# EAGLE board LPS22HP_pcb_v2_tiled (EAGLE 8.2.2)
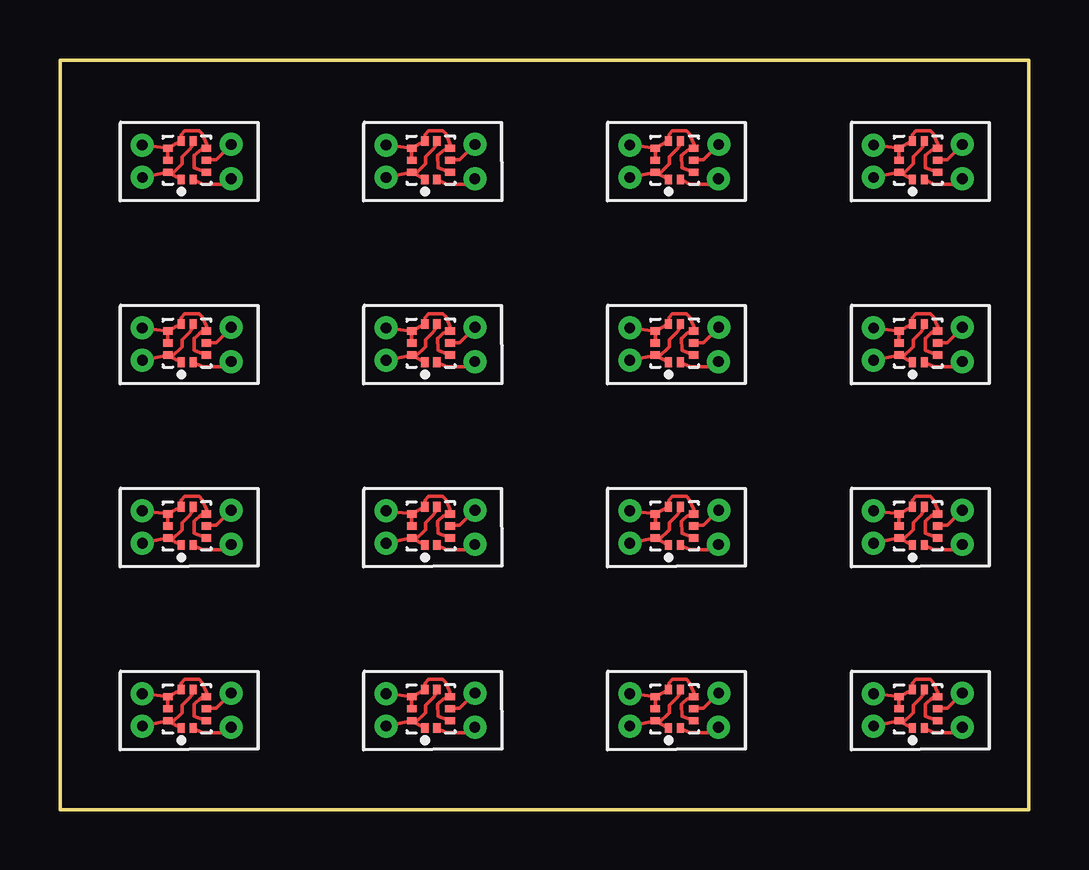
[diagram p0: board, top side]
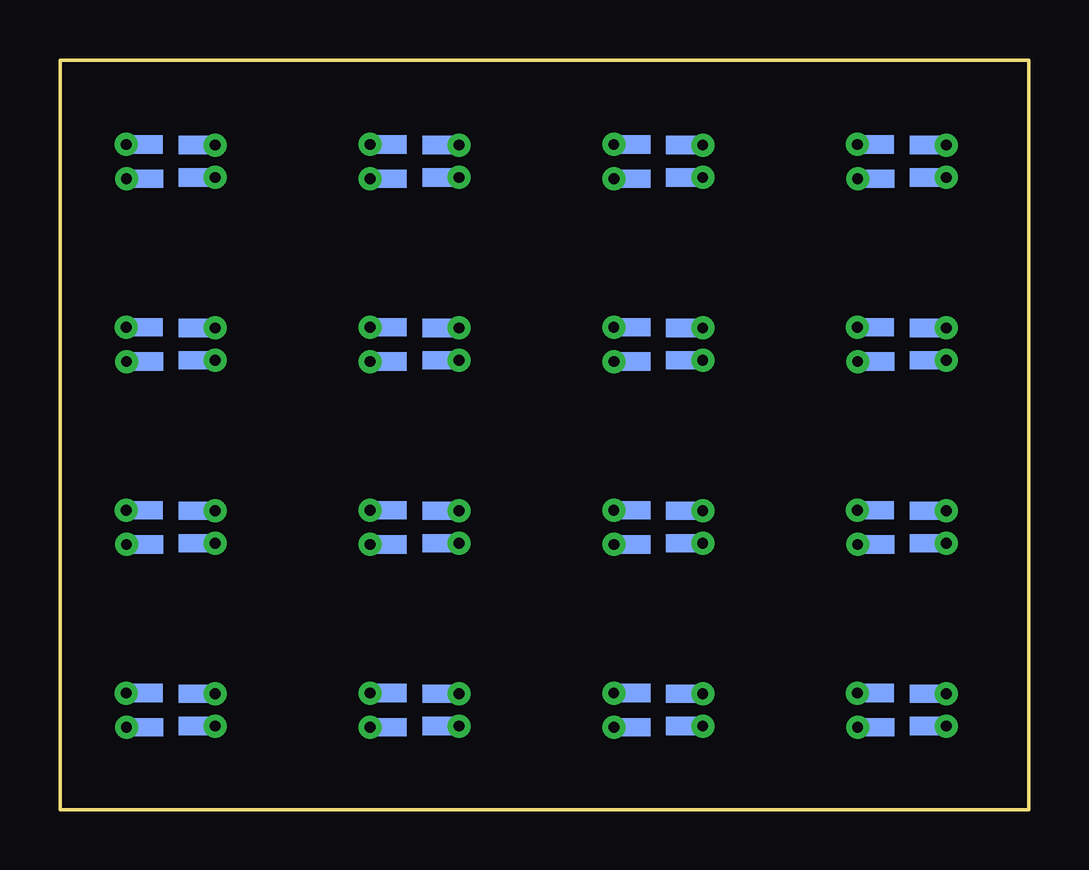
[diagram p1: board, bottom side, seen from below]

Size 40.39 x 31.24 mm. Coordinates in mm from the lower left corner, seen from the top.
Outline: 0,0 0,31.24 40.39,31.24 40.39,0 0,0
Copper layers (1*16): Top 0.035mm / dielectric 1.5mm / Bottom 0.035mm
Design rules "default": minimum track width 6mil, minimum drill 0.35mm, track to track 6mil, track to pad 6mil, pad to pad 6mil, via to via 6mil, smd to smd 6mil, copper to edge 40mil, drill to drill 6mil, minimum pad ring 10mil, minimum via ring 8mil, stop-mask expansion 4mil, vias tented up to drill 0mil, thermal gap 10mil

## Footprints (pad centres in the part's own frame; a part is rotated, then mirrored left to right if it is on the bottom)
LGA10R50P2X3_200X200X80 = smd 0.4 x 0.3: 1 -0.8,0.25; 2 -0.8,-0.25; 6 0.8,-0.25; 7 0.8,0.25 | smd 0.3 x 0.4: 3 -0.5,-0.8; 4 0,-0.8; 5 0.5,-0.8; 8 0.5,0.8; 9 0,0.8; 10 -0.5,0.8
WIREPAD_0,6/0,4_PAD = drill 0.45 pad 0.813: P$1 0,0.051 | smd 0.762 x 1.27: P$2 0,-0.838

## Placement (x,y rotation side)
U1  LPS22HB  [LGA10R50P2X3_200X200X80]  5.3,4.21 90 top
U2  LPS22HB  [LGA10R50P2X3_200X200X80]  5.3,11.83 90 top
U3  LPS22HB  [LGA10R50P2X3_200X200X80]  5.3,19.45 90 top
U4  LPS22HB  [LGA10R50P2X3_200X200X80]  5.3,27.07 90 top
U5  LPS22HB  [LGA10R50P2X3_200X200X80]  15.46,4.21 90 top
U6  LPS22HB  [LGA10R50P2X3_200X200X80]  15.46,11.83 90 top
U7  LPS22HB  [LGA10R50P2X3_200X200X80]  15.46,19.45 90 top
U8  LPS22HB  [LGA10R50P2X3_200X200X80]  15.46,27.07 90 top
U9  LPS22HB  [LGA10R50P2X3_200X200X80]  25.62,4.21 90 top
U10  LPS22HB  [LGA10R50P2X3_200X200X80]  25.62,11.83 90 top
U11  LPS22HB  [LGA10R50P2X3_200X200X80]  25.62,19.45 90 top
U12  LPS22HB  [LGA10R50P2X3_200X200X80]  25.62,27.07 90 top
U13  LPS22HB  [LGA10R50P2X3_200X200X80]  35.78,4.21 90 top
U14  LPS22HB  [LGA10R50P2X3_200X200X80]  35.78,11.83 90 top
U15  LPS22HB  [LGA10R50P2X3_200X200X80]  35.78,19.45 90 top
U16  LPS22HB  [LGA10R50P2X3_200X200X80]  35.78,27.07 90 top
U$1  WIREPAD_PADWIREPAD_0,6/0,4_PAD  [WIREPAD_0,6/0,4_PAD]  3.48,3.49 270 bottom
U$2  WIREPAD_PADWIREPAD_0,6/0,4_PAD  [WIREPAD_0,6/0,4_PAD]  3.48,4.84 270 bottom
U$3  WIREPAD_PADWIREPAD_0,6/0,4_PAD  [WIREPAD_0,6/0,4_PAD]  7.08,11.06 90 bottom
U$4  WIREPAD_PADWIREPAD_0,6/0,4_PAD  [WIREPAD_0,6/0,4_PAD]  7.09,12.48 90 bottom
U$5  WIREPAD_PADWIREPAD_0,6/0,4_PAD  [WIREPAD_0,6/0,4_PAD]  3.48,11.11 270 bottom
U$6  WIREPAD_PADWIREPAD_0,6/0,4_PAD  [WIREPAD_0,6/0,4_PAD]  7.08,3.44 90 bottom
U$7  WIREPAD_PADWIREPAD_0,6/0,4_PAD  [WIREPAD_0,6/0,4_PAD]  7.09,4.86 90 bottom
U$8  WIREPAD_PADWIREPAD_0,6/0,4_PAD  [WIREPAD_0,6/0,4_PAD]  3.48,12.46 270 bottom
U$9  WIREPAD_PADWIREPAD_0,6/0,4_PAD  [WIREPAD_0,6/0,4_PAD]  7.08,18.68 90 bottom
U$10  WIREPAD_PADWIREPAD_0,6/0,4_PAD  [WIREPAD_0,6/0,4_PAD]  7.09,20.1 90 bottom
U$11  WIREPAD_PADWIREPAD_0,6/0,4_PAD  [WIREPAD_0,6/0,4_PAD]  3.48,18.73 270 bottom
U$12  WIREPAD_PADWIREPAD_0,6/0,4_PAD  [WIREPAD_0,6/0,4_PAD]  3.48,20.08 270 bottom
U$13  WIREPAD_PADWIREPAD_0,6/0,4_PAD  [WIREPAD_0,6/0,4_PAD]  7.08,26.3 90 bottom
U$14  WIREPAD_PADWIREPAD_0,6/0,4_PAD  [WIREPAD_0,6/0,4_PAD]  7.09,27.72 90 bottom
U$15  WIREPAD_PADWIREPAD_0,6/0,4_PAD  [WIREPAD_0,6/0,4_PAD]  3.48,26.35 270 bottom
U$16  WIREPAD_PADWIREPAD_0,6/0,4_PAD  [WIREPAD_0,6/0,4_PAD]  3.48,27.7 270 bottom
U$17  WIREPAD_PADWIREPAD_0,6/0,4_PAD  [WIREPAD_0,6/0,4_PAD]  17.24,3.44 90 bottom
U$18  WIREPAD_PADWIREPAD_0,6/0,4_PAD  [WIREPAD_0,6/0,4_PAD]  17.25,4.86 90 bottom
U$19  WIREPAD_PADWIREPAD_0,6/0,4_PAD  [WIREPAD_0,6/0,4_PAD]  13.64,3.49 270 bottom
U$20  WIREPAD_PADWIREPAD_0,6/0,4_PAD  [WIREPAD_0,6/0,4_PAD]  13.64,4.84 270 bottom
U$21  WIREPAD_PADWIREPAD_0,6/0,4_PAD  [WIREPAD_0,6/0,4_PAD]  17.24,11.06 90 bottom
U$22  WIREPAD_PADWIREPAD_0,6/0,4_PAD  [WIREPAD_0,6/0,4_PAD]  17.25,12.48 90 bottom
U$23  WIREPAD_PADWIREPAD_0,6/0,4_PAD  [WIREPAD_0,6/0,4_PAD]  13.64,11.11 270 bottom
U$24  WIREPAD_PADWIREPAD_0,6/0,4_PAD  [WIREPAD_0,6/0,4_PAD]  13.64,12.46 270 bottom
U$25  WIREPAD_PADWIREPAD_0,6/0,4_PAD  [WIREPAD_0,6/0,4_PAD]  17.24,18.68 90 bottom
U$26  WIREPAD_PADWIREPAD_0,6/0,4_PAD  [WIREPAD_0,6/0,4_PAD]  17.25,20.1 90 bottom
U$27  WIREPAD_PADWIREPAD_0,6/0,4_PAD  [WIREPAD_0,6/0,4_PAD]  13.64,18.73 270 bottom
U$28  WIREPAD_PADWIREPAD_0,6/0,4_PAD  [WIREPAD_0,6/0,4_PAD]  13.64,20.08 270 bottom
U$29  WIREPAD_PADWIREPAD_0,6/0,4_PAD  [WIREPAD_0,6/0,4_PAD]  17.24,26.3 90 bottom
U$30  WIREPAD_PADWIREPAD_0,6/0,4_PAD  [WIREPAD_0,6/0,4_PAD]  17.25,27.72 90 bottom
U$31  WIREPAD_PADWIREPAD_0,6/0,4_PAD  [WIREPAD_0,6/0,4_PAD]  13.64,26.35 270 bottom
U$32  WIREPAD_PADWIREPAD_0,6/0,4_PAD  [WIREPAD_0,6/0,4_PAD]  13.64,27.7 270 bottom
U$33  WIREPAD_PADWIREPAD_0,6/0,4_PAD  [WIREPAD_0,6/0,4_PAD]  27.4,3.44 90 bottom
U$34  WIREPAD_PADWIREPAD_0,6/0,4_PAD  [WIREPAD_0,6/0,4_PAD]  27.41,4.86 90 bottom
U$35  WIREPAD_PADWIREPAD_0,6/0,4_PAD  [WIREPAD_0,6/0,4_PAD]  23.8,3.49 270 bottom
U$36  WIREPAD_PADWIREPAD_0,6/0,4_PAD  [WIREPAD_0,6/0,4_PAD]  23.8,4.84 270 bottom
U$37  WIREPAD_PADWIREPAD_0,6/0,4_PAD  [WIREPAD_0,6/0,4_PAD]  27.4,11.06 90 bottom
U$38  WIREPAD_PADWIREPAD_0,6/0,4_PAD  [WIREPAD_0,6/0,4_PAD]  27.41,12.48 90 bottom
U$39  WIREPAD_PADWIREPAD_0,6/0,4_PAD  [WIREPAD_0,6/0,4_PAD]  23.8,11.11 270 bottom
U$40  WIREPAD_PADWIREPAD_0,6/0,4_PAD  [WIREPAD_0,6/0,4_PAD]  23.8,12.46 270 bottom
U$41  WIREPAD_PADWIREPAD_0,6/0,4_PAD  [WIREPAD_0,6/0,4_PAD]  27.4,18.68 90 bottom
U$42  WIREPAD_PADWIREPAD_0,6/0,4_PAD  [WIREPAD_0,6/0,4_PAD]  27.41,20.1 90 bottom
U$43  WIREPAD_PADWIREPAD_0,6/0,4_PAD  [WIREPAD_0,6/0,4_PAD]  23.8,18.73 270 bottom
U$44  WIREPAD_PADWIREPAD_0,6/0,4_PAD  [WIREPAD_0,6/0,4_PAD]  23.8,20.08 270 bottom
U$45  WIREPAD_PADWIREPAD_0,6/0,4_PAD  [WIREPAD_0,6/0,4_PAD]  27.4,26.3 90 bottom
U$46  WIREPAD_PADWIREPAD_0,6/0,4_PAD  [WIREPAD_0,6/0,4_PAD]  27.41,27.72 90 bottom
U$47  WIREPAD_PADWIREPAD_0,6/0,4_PAD  [WIREPAD_0,6/0,4_PAD]  23.8,26.35 270 bottom
U$48  WIREPAD_PADWIREPAD_0,6/0,4_PAD  [WIREPAD_0,6/0,4_PAD]  23.8,27.7 270 bottom
U$49  WIREPAD_PADWIREPAD_0,6/0,4_PAD  [WIREPAD_0,6/0,4_PAD]  37.56,3.44 90 bottom
U$50  WIREPAD_PADWIREPAD_0,6/0,4_PAD  [WIREPAD_0,6/0,4_PAD]  37.57,4.86 90 bottom
U$51  WIREPAD_PADWIREPAD_0,6/0,4_PAD  [WIREPAD_0,6/0,4_PAD]  33.96,3.49 270 bottom
U$52  WIREPAD_PADWIREPAD_0,6/0,4_PAD  [WIREPAD_0,6/0,4_PAD]  33.96,4.84 270 bottom
U$53  WIREPAD_PADWIREPAD_0,6/0,4_PAD  [WIREPAD_0,6/0,4_PAD]  37.56,11.06 90 bottom
U$54  WIREPAD_PADWIREPAD_0,6/0,4_PAD  [WIREPAD_0,6/0,4_PAD]  37.57,12.48 90 bottom
U$55  WIREPAD_PADWIREPAD_0,6/0,4_PAD  [WIREPAD_0,6/0,4_PAD]  33.96,11.11 270 bottom
U$56  WIREPAD_PADWIREPAD_0,6/0,4_PAD  [WIREPAD_0,6/0,4_PAD]  33.96,12.46 270 bottom
U$57  WIREPAD_PADWIREPAD_0,6/0,4_PAD  [WIREPAD_0,6/0,4_PAD]  37.56,18.68 90 bottom
U$58  WIREPAD_PADWIREPAD_0,6/0,4_PAD  [WIREPAD_0,6/0,4_PAD]  37.57,20.1 90 bottom
U$59  WIREPAD_PADWIREPAD_0,6/0,4_PAD  [WIREPAD_0,6/0,4_PAD]  33.96,18.73 270 bottom
U$60  WIREPAD_PADWIREPAD_0,6/0,4_PAD  [WIREPAD_0,6/0,4_PAD]  33.96,20.08 270 bottom
U$61  WIREPAD_PADWIREPAD_0,6/0,4_PAD  [WIREPAD_0,6/0,4_PAD]  37.56,26.3 90 bottom
U$62  WIREPAD_PADWIREPAD_0,6/0,4_PAD  [WIREPAD_0,6/0,4_PAD]  37.57,27.72 90 bottom
U$63  WIREPAD_PADWIREPAD_0,6/0,4_PAD  [WIREPAD_0,6/0,4_PAD]  33.96,26.35 270 bottom
U$64  WIREPAD_PADWIREPAD_0,6/0,4_PAD  [WIREPAD_0,6/0,4_PAD]  33.96,27.7 270 bottom

## Library data of the parts
U1-U16 = LPS22HB; AVAILABILITY: Unavailable; DESCRIPTION: MEMS nano pressure sensor: 260-1260 hPa absolute digital output barometer; MF: STMicroelectronics; MP: LPS22HB; PACKAGE: None; PRICE: None
U$1-U$64 = Sombeck_lib

## Nets
+3V1: U2.1 U2.6 U2.10 U$5.P$1 U$5.P$2
+3V2: U3.1 U3.6 U3.10 U$11.P$1 U$11.P$2
+3V3: U1.1 U1.6 U1.10 U$1.P$1 U$1.P$2
+3V4: U4.1 U4.6 U4.10 U$15.P$1 U$15.P$2
+3V5: U5.1 U5.6 U5.10 U$19.P$1 U$19.P$2
+3V6: U6.1 U6.6 U6.10 U$23.P$1 U$23.P$2
+3V7: U7.1 U7.6 U7.10 U$27.P$1 U$27.P$2
+3V8: U8.1 U8.6 U8.10 U$31.P$1 U$31.P$2
+3V9: U9.1 U9.6 U9.10 U$35.P$1 U$35.P$2
+3V10: U10.1 U10.6 U10.10 U$39.P$1 U$39.P$2
+3V11: U11.1 U11.6 U11.10 U$43.P$1 U$43.P$2
+3V12: U12.1 U12.6 U12.10 U$47.P$1 U$47.P$2
+3V13: U13.1 U13.6 U13.10 U$51.P$1 U$51.P$2
+3V14: U14.1 U14.6 U14.10 U$55.P$1 U$55.P$2
+3V15: U15.1 U15.6 U15.10 U$59.P$1 U$59.P$2
+3V16: U16.1 U16.6 U16.10 U$63.P$1 U$63.P$2
GND: U1.3 U1.5 U1.7 U1.8 U1.9 U$2.P$1 U$2.P$2
GND1: U2.3 U2.5 U2.7 U2.8 U2.9 U$8.P$1 U$8.P$2
GND2: U3.3 U3.5 U3.7 U3.8 U3.9 U$12.P$1 U$12.P$2
GND3: U4.3 U4.5 U4.7 U4.8 U4.9 U$16.P$1 U$16.P$2
GND4: U5.3 U5.5 U5.7 U5.8 U5.9 U$20.P$1 U$20.P$2
GND5: U6.3 U6.5 U6.7 U6.8 U6.9 U$24.P$1 U$24.P$2
GND6: U7.3 U7.5 U7.7 U7.8 U7.9 U$28.P$1 U$28.P$2
GND7: U8.3 U8.5 U8.7 U8.8 U8.9 U$32.P$1 U$32.P$2
GND8: U9.3 U9.5 U9.7 U9.8 U9.9 U$36.P$1 U$36.P$2
GND9: U10.3 U10.5 U10.7 U10.8 U10.9 U$40.P$1 U$40.P$2
GND10: U11.3 U11.5 U11.7 U11.8 U11.9 U$44.P$1 U$44.P$2
GND11: U12.3 U12.5 U12.7 U12.8 U12.9 U$48.P$1 U$48.P$2
GND12: U13.3 U13.5 U13.7 U13.8 U13.9 U$52.P$1 U$52.P$2
GND13: U14.3 U14.5 U14.7 U14.8 U14.9 U$56.P$1 U$56.P$2
GND14: U15.3 U15.5 U15.7 U15.8 U15.9 U$60.P$1 U$60.P$2
GND15: U16.3 U16.5 U16.7 U16.8 U16.9 U$64.P$1 U$64.P$2
N$1: U2.2 U$3.P$1 U$3.P$2
N$2: U1.2 U$6.P$1 U$6.P$2
N$3: U1.4 U$7.P$1 U$7.P$2
N$4: U2.4 U$4.P$1 U$4.P$2
N$5: U3.2 U$9.P$1 U$9.P$2
N$6: U3.4 U$10.P$1 U$10.P$2
N$7: U4.2 U$13.P$1 U$13.P$2
N$8: U4.4 U$14.P$1 U$14.P$2
N$9: U5.2 U$17.P$1 U$17.P$2
N$10: U5.4 U$18.P$1 U$18.P$2
N$11: U6.2 U$21.P$1 U$21.P$2
N$12: U6.4 U$22.P$1 U$22.P$2
N$13: U7.2 U$25.P$1 U$25.P$2
N$14: U7.4 U$26.P$1 U$26.P$2
N$15: U8.2 U$29.P$1 U$29.P$2
N$16: U8.4 U$30.P$1 U$30.P$2
N$17: U9.2 U$33.P$1 U$33.P$2
N$18: U9.4 U$34.P$1 U$34.P$2
N$19: U10.2 U$37.P$1 U$37.P$2
N$20: U10.4 U$38.P$1 U$38.P$2
N$21: U11.2 U$41.P$1 U$41.P$2
N$22: U11.4 U$42.P$1 U$42.P$2
N$23: U12.2 U$45.P$1 U$45.P$2
N$24: U12.4 U$46.P$1 U$46.P$2
N$25: U13.2 U$49.P$1 U$49.P$2
N$26: U13.4 U$50.P$1 U$50.P$2
N$27: U14.2 U$53.P$1 U$53.P$2
N$28: U14.4 U$54.P$1 U$54.P$2
N$29: U15.2 U$57.P$1 U$57.P$2
N$30: U15.4 U$58.P$1 U$58.P$2
N$31: U16.2 U$61.P$1 U$61.P$2
N$32: U16.4 U$62.P$1 U$62.P$2

## Tracks (layer width: path | path; a pad name or v marks a point on that pad's centre or on a via)
+3V1
  Top 0.152: U2.1 U2.10 | U$5.P$1 U2.10 | U2.10 4.65,11.25 5.08,11.67 5.08,11.97 5.4,12.28 5.55,12.48 U2.6
  Bottom 0.152: U$5.P$1 U$5.P$2
+3V2
  Top 0.152: U3.1 U3.10 | U$11.P$1 U3.10 | U3.10 4.65,18.87 5.08,19.29 5.08,19.59 5.4,19.9 5.55,20.1 U3.6
  Bottom 0.152: U$11.P$1 U$11.P$2
+3V3
  Top 0.152: U1.1 U1.10 | U$1.P$1 U1.10 | U1.10 4.65,3.63 5.08,4.05 5.08,4.35 5.4,4.66 5.55,4.86 U1.6
  Bottom 0.152: U$1.P$1 U$1.P$2
+3V4
  Top 0.152: U4.1 U4.10 | U$15.P$1 U4.10 | U4.10 4.65,26.49 5.08,26.91 5.08,27.21 5.4,27.52 5.55,27.72 U4.6
  Bottom 0.152: U$15.P$1 U$15.P$2
+3V5
  Top 0.152: U5.1 U5.10 | U$19.P$1 U5.10 | U5.10 14.81,3.63 15.24,4.05 15.24,4.35 15.56,4.66 15.71,4.86 U5.6
  Bottom 0.152: U$19.P$1 U$19.P$2
+3V6
  Top 0.152: U6.1 U6.10 | U$23.P$1 U6.10 | U6.10 14.81,11.25 15.24,11.67 15.24,11.97 15.56,12.28 15.71,12.48 U6.6
  Bottom 0.152: U$23.P$1 U$23.P$2
+3V7
  Top 0.152: U7.1 U7.10 | U$27.P$1 U7.10 | U7.10 14.81,18.87 15.24,19.29 15.24,19.59 15.56,19.9 15.71,20.1 U7.6
  Bottom 0.152: U$27.P$1 U$27.P$2
+3V8
  Top 0.152: U8.1 U8.10 | U$31.P$1 U8.10 | U8.10 14.81,26.49 15.24,26.91 15.24,27.21 15.56,27.52 15.71,27.72 U8.6
  Bottom 0.152: U$31.P$1 U$31.P$2
+3V9
  Top 0.152: U9.1 U9.10 | U$35.P$1 U9.10 | U9.10 24.97,3.63 25.41,4.05 25.41,4.35 25.72,4.66 25.87,4.86 U9.6
  Bottom 0.152: U$35.P$1 U$35.P$2
+3V10
  Top 0.152: U10.1 U10.10 | U$39.P$1 U10.10 | U10.10 24.97,11.25 25.41,11.67 25.41,11.97 25.72,12.28 25.87,12.48 U10.6
  Bottom 0.152: U$39.P$1 U$39.P$2
+3V11
  Top 0.152: U11.1 U11.10 | U$43.P$1 U11.10 | U11.10 24.97,18.87 25.41,19.29 25.41,19.59 25.72,19.9 25.87,20.1 U11.6
  Bottom 0.152: U$43.P$1 U$43.P$2
+3V12
  Top 0.152: U12.1 U12.10 | U$47.P$1 U12.10 | U12.10 24.97,26.49 25.41,26.91 25.41,27.21 25.72,27.52 25.87,27.72 U12.6
  Bottom 0.152: U$47.P$1 U$47.P$2
+3V13
  Top 0.152: U13.1 U13.10 | U$51.P$1 U13.10 | U13.10 35.13,3.63 35.56,4.05 35.56,4.35 35.88,4.66 36.03,4.86 U13.6
  Bottom 0.152: U$51.P$1 U$51.P$2
+3V14
  Top 0.152: U14.1 U14.10 | U$55.P$1 U14.10 | U14.10 35.13,11.25 35.56,11.67 35.56,11.97 35.88,12.28 36.03,12.48 U14.6
  Bottom 0.152: U$55.P$1 U$55.P$2
+3V15
  Top 0.152: U15.1 U15.10 | U$59.P$1 U15.10 | U15.10 35.13,18.87 35.56,19.29 35.56,19.59 35.88,19.9 36.03,20.1 U15.6
  Bottom 0.152: U$59.P$1 U$59.P$2
+3V16
  Top 0.152: U16.1 U16.10 | U$63.P$1 U16.10 | U16.10 35.13,26.49 35.56,26.91 35.56,27.21 35.88,27.52 36.03,27.72 U16.6
  Bottom 0.152: U$63.P$1 U$63.P$2
GND
  Top 0.152: U1.9 U1.8 | U1.8 3.74,4.81 U$2.P$1 | U1.8 U1.7 5.05,5.11 5.06,5.27 5.2,5.44 5.79,5.44 5.93,5.3 6.11,4.88 U1.5 5.93,4.68 5.81,4.61 5.65,4.46 5.59,4.41 5.6,3.9 U1.3
  Bottom 0.152: U$2.P$1 U$2.P$2
GND1
  Top 0.152: U2.9 U2.8 | U2.8 3.74,12.43 U$8.P$1 | U2.8 U2.7 5.05,12.73 5.06,12.89 5.2,13.06 5.79,13.06 5.93,12.92 6.11,12.5 U2.5 5.93,12.3 5.81,12.23 5.65,12.08 5.59,12.03 5.6,11.52 U2.3
  Bottom 0.152: U$8.P$1 U$8.P$2
GND2
  Top 0.152: U3.9 U3.8 | U3.8 3.74,20.05 U$12.P$1 | U3.8 U3.7 5.05,20.35 5.06,20.51 5.2,20.68 5.79,20.68 5.93,20.54 6.11,20.12 U3.5 5.93,19.92 5.81,19.85 5.65,19.7 5.59,19.65 5.6,19.14 U3.3
  Bottom 0.152: U$12.P$1 U$12.P$2
GND3
  Top 0.152: U4.9 U4.8 | U4.8 3.74,27.67 U$16.P$1 | U4.8 U4.7 5.05,27.97 5.06,28.13 5.2,28.3 5.79,28.3 5.93,28.16 6.11,27.74 U4.5 5.93,27.54 5.81,27.47 5.65,27.32 5.59,27.27 5.6,26.76 U4.3
  Bottom 0.152: U$16.P$1 U$16.P$2
GND4
  Top 0.152: U5.9 U5.8 | U5.8 13.9,4.81 U$20.P$1 | U5.8 U5.7 15.21,5.11 15.22,5.27 15.36,5.44 15.95,5.44 16.09,5.3 16.27,4.88 U5.5 16.09,4.68 15.97,4.61 15.81,4.46 15.75,4.41 15.76,3.9 U5.3
  Bottom 0.152: U$20.P$1 U$20.P$2
GND5
  Top 0.152: U6.9 U6.8 | U6.8 13.9,12.43 U$24.P$1 | U6.8 U6.7 15.21,12.73 15.22,12.89 15.36,13.06 15.95,13.06 16.09,12.92 16.27,12.5 U6.5 16.09,12.3 15.97,12.23 15.81,12.08 15.75,12.03 15.76,11.52 U6.3
  Bottom 0.152: U$24.P$1 U$24.P$2
GND6
  Top 0.152: U7.9 U7.8 | U7.8 13.9,20.05 U$28.P$1 | U7.8 U7.7 15.21,20.35 15.22,20.51 15.36,20.68 15.95,20.68 16.09,20.54 16.27,20.12 U7.5 16.09,19.92 15.97,19.85 15.81,19.7 15.75,19.65 15.76,19.14 U7.3
  Bottom 0.152: U$28.P$1 U$28.P$2
GND7
  Top 0.152: U8.9 U8.8 | U8.8 13.9,27.67 U$32.P$1 | U8.8 U8.7 15.21,27.97 15.22,28.13 15.36,28.3 15.95,28.3 16.09,28.16 16.27,27.74 U8.5 16.09,27.54 15.97,27.47 15.81,27.32 15.75,27.27 15.76,26.76 U8.3
  Bottom 0.152: U$32.P$1 U$32.P$2
GND8
  Top 0.152: U9.9 U9.8 | U9.8 24.06,4.81 U$36.P$1 | U9.8 U9.7 25.37,5.11 25.38,5.27 25.52,5.44 26.11,5.44 26.25,5.3 26.43,4.88 U9.5 26.25,4.68 26.13,4.61 25.97,4.46 25.91,4.41 25.92,3.9 U9.3
  Bottom 0.152: U$36.P$1 U$36.P$2
GND9
  Top 0.152: U10.9 U10.8 | U10.8 24.06,12.43 U$40.P$1 | U10.8 U10.7 25.37,12.73 25.38,12.89 25.52,13.06 26.11,13.06 26.25,12.92 26.43,12.5 U10.5 26.25,12.3 26.13,12.23 25.97,12.08 25.91,12.03 25.92,11.52 U10.3
  Bottom 0.152: U$40.P$1 U$40.P$2
GND10
  Top 0.152: U11.9 U11.8 | U11.8 24.06,20.05 U$44.P$1 | U11.8 U11.7 25.37,20.35 25.38,20.51 25.52,20.68 26.11,20.68 26.25,20.54 26.43,20.12 U11.5 26.25,19.92 26.13,19.85 25.97,19.7 25.91,19.65 25.92,19.14 U11.3
  Bottom 0.152: U$44.P$1 U$44.P$2
GND11
  Top 0.152: U12.9 U12.8 | U12.8 24.06,27.67 U$48.P$1 | U12.8 U12.7 25.37,27.97 25.38,28.13 25.52,28.3 26.11,28.3 26.25,28.16 26.43,27.74 U12.5 26.25,27.54 26.13,27.47 25.97,27.32 25.91,27.27 25.92,26.76 U12.3
  Bottom 0.152: U$48.P$1 U$48.P$2
GND12
  Top 0.152: U13.9 U13.8 | U13.8 34.22,4.81 U$52.P$1 | U13.8 U13.7 35.53,5.11 35.54,5.27 35.68,5.44 36.27,5.44 36.41,5.3 36.59,4.88 U13.5 36.41,4.68 36.29,4.61 36.13,4.46 36.07,4.41 36.08,3.9 U13.3
  Bottom 0.152: U$52.P$1 U$52.P$2
GND13
  Top 0.152: U14.9 U14.8 | U14.8 34.22,12.43 U$56.P$1 | U14.8 U14.7 35.53,12.73 35.54,12.89 35.68,13.06 36.27,13.06 36.41,12.92 36.59,12.5 U14.5 36.41,12.3 36.29,12.23 36.13,12.08 36.07,12.03 36.08,11.52 U14.3
  Bottom 0.152: U$56.P$1 U$56.P$2
GND14
  Top 0.152: U15.9 U15.8 | U15.8 34.22,20.05 U$60.P$1 | U15.8 U15.7 35.53,20.35 35.54,20.51 35.68,20.68 36.27,20.68 36.41,20.54 36.59,20.12 U15.5 36.41,19.92 36.29,19.85 36.13,19.7 36.07,19.65 36.08,19.14 U15.3
  Bottom 0.152: U$60.P$1 U$60.P$2
GND15
  Top 0.152: U16.9 U16.8 | U16.8 34.22,27.67 U$64.P$1 | U16.8 U16.7 35.53,27.97 35.54,28.13 35.68,28.3 36.27,28.3 36.41,28.16 36.59,27.74 U16.5 36.41,27.54 36.29,27.47 36.13,27.32 36.07,27.27 36.08,26.76 U16.3
  Bottom 0.152: U$64.P$1 U$64.P$2
N$1
  Top 0.152: U2.2 5.94,10.83 6.91,10.83 U$3.P$1
  Bottom 0.152: U$3.P$1 U$3.P$2
N$2
  Top 0.152: U1.2 5.94,3.21 6.91,3.21 U$6.P$1
  Bottom 0.152: U$6.P$1 U$6.P$2
N$3
  Top 0.152: U1.4 6.12,4.23 6.5,4.23 U$7.P$1
  Bottom 0.152: U$7.P$1 U$7.P$2
N$4
  Top 0.152: U2.4 6.12,11.85 6.5,11.85 U$4.P$1
  Bottom 0.152: U$4.P$1 U$4.P$2
N$5
  Top 0.152: U3.2 5.94,18.45 6.91,18.45 U$9.P$1
  Bottom 0.152: U$9.P$1 U$9.P$2
N$6
  Top 0.152: U3.4 6.12,19.47 6.5,19.47 U$10.P$1
  Bottom 0.152: U$10.P$1 U$10.P$2
N$7
  Top 0.152: U4.2 5.94,26.07 6.91,26.07 U$13.P$1
  Bottom 0.152: U$13.P$1 U$13.P$2
N$8
  Top 0.152: U4.4 6.12,27.09 6.5,27.09 U$14.P$1
  Bottom 0.152: U$14.P$1 U$14.P$2
N$9
  Top 0.152: U5.2 16.1,3.21 17.07,3.21 U$17.P$1
  Bottom 0.152: U$17.P$1 U$17.P$2
N$10
  Top 0.152: U5.4 16.28,4.23 16.66,4.23 U$18.P$1
  Bottom 0.152: U$18.P$1 U$18.P$2
N$11
  Top 0.152: U6.2 16.1,10.83 17.07,10.83 U$21.P$1
  Bottom 0.152: U$21.P$1 U$21.P$2
N$12
  Top 0.152: U6.4 16.28,11.85 16.66,11.85 U$22.P$1
  Bottom 0.152: U$22.P$1 U$22.P$2
N$13
  Top 0.152: U7.2 16.1,18.45 17.07,18.45 U$25.P$1
  Bottom 0.152: U$25.P$1 U$25.P$2
N$14
  Top 0.152: U7.4 16.28,19.47 16.66,19.47 U$26.P$1
  Bottom 0.152: U$26.P$1 U$26.P$2
N$15
  Top 0.152: U8.2 16.1,26.07 17.07,26.07 U$29.P$1
  Bottom 0.152: U$29.P$1 U$29.P$2
N$16
  Top 0.152: U8.4 16.28,27.09 16.66,27.09 U$30.P$1
  Bottom 0.152: U$30.P$1 U$30.P$2
N$17
  Top 0.152: U9.2 26.26,3.21 27.23,3.21 U$33.P$1
  Bottom 0.152: U$33.P$1 U$33.P$2
N$18
  Top 0.152: U9.4 26.44,4.23 26.82,4.23 U$34.P$1
  Bottom 0.152: U$34.P$1 U$34.P$2
N$19
  Top 0.152: U10.2 26.26,10.83 27.23,10.83 U$37.P$1
  Bottom 0.152: U$37.P$1 U$37.P$2
N$20
  Top 0.152: U10.4 26.44,11.85 26.82,11.85 U$38.P$1
  Bottom 0.152: U$38.P$1 U$38.P$2
N$21
  Top 0.152: U11.2 26.26,18.45 27.23,18.45 U$41.P$1
  Bottom 0.152: U$41.P$1 U$41.P$2
N$22
  Top 0.152: U11.4 26.44,19.47 26.82,19.47 U$42.P$1
  Bottom 0.152: U$42.P$1 U$42.P$2
N$23
  Top 0.152: U12.2 26.26,26.07 27.23,26.07 U$45.P$1
  Bottom 0.152: U$45.P$1 U$45.P$2
N$24
  Top 0.152: U12.4 26.44,27.09 26.82,27.09 U$46.P$1
  Bottom 0.152: U$46.P$1 U$46.P$2
N$25
  Top 0.152: U13.2 36.42,3.21 37.39,3.21 U$49.P$1
  Bottom 0.152: U$49.P$1 U$49.P$2
N$26
  Top 0.152: U13.4 36.6,4.23 36.98,4.23 U$50.P$1
  Bottom 0.152: U$50.P$1 U$50.P$2
N$27
  Top 0.152: U14.2 36.42,10.83 37.39,10.83 U$53.P$1
  Bottom 0.152: U$53.P$1 U$53.P$2
N$28
  Top 0.152: U14.4 36.6,11.85 36.98,11.85 U$54.P$1
  Bottom 0.152: U$54.P$1 U$54.P$2
N$29
  Top 0.152: U15.2 36.42,18.45 37.39,18.45 U$57.P$1
  Bottom 0.152: U$57.P$1 U$57.P$2
N$30
  Top 0.152: U15.4 36.6,19.47 36.98,19.47 U$58.P$1
  Bottom 0.152: U$58.P$1 U$58.P$2
N$31
  Top 0.152: U16.2 36.42,26.07 37.39,26.07 U$61.P$1
  Bottom 0.152: U$61.P$1 U$61.P$2
N$32
  Top 0.152: U16.4 36.6,27.09 36.98,27.09 U$62.P$1
  Bottom 0.152: U$62.P$1 U$62.P$2